# Altium PCB 滚动足球蓝牙款 V1.0 双面板 板厚1.0mm.PcbDoc (part 2 of 2)
Units mm, origin at the board's own origin, x right, y up, seen from the top; angles counter-clockwise.
Board outline 50.85 x 46.58 mm, 2 copper layers (Top Layer, Bottom Layer); 60 components, 35 nets, 162 pads, 92 vias.
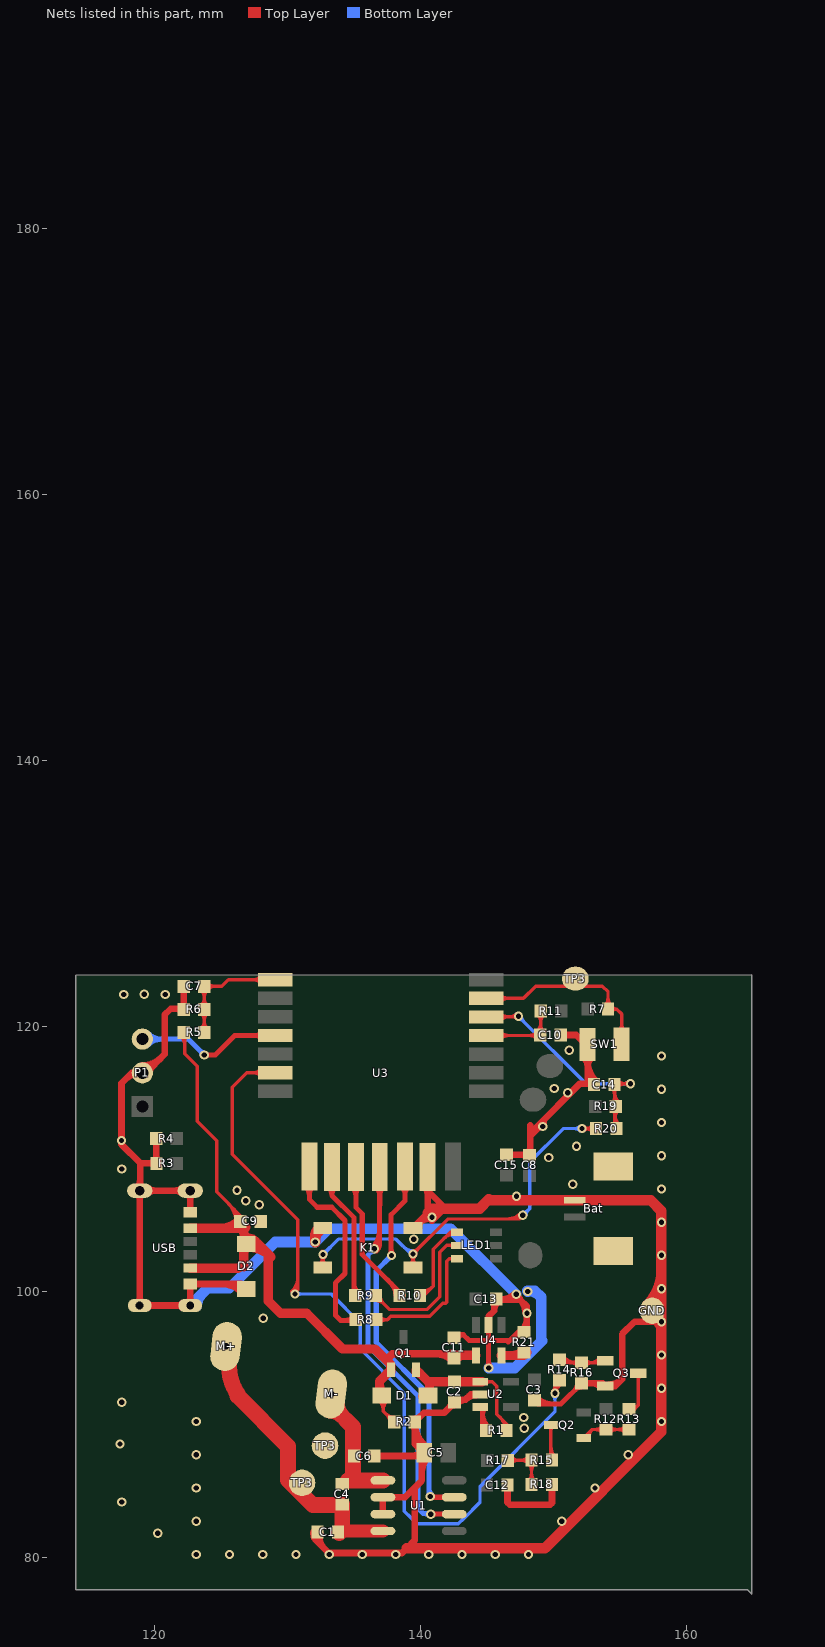
[diagram p2: the nets of this part, all layers, seen from the top]

## Via types
v1: diameter 0.7, hole 0.4, Top Layer to Bottom Layer, tented both sides, 92 vias

## Nets (pads, with @x,y where several pads share a name; then routed paths per layer and width w, separated by ;. In a path a pad name is that pad's centre, name@x,y a point inside that pad or via, vN(x,y) a via of type N, cw(c..) or ccw(c..) an arc to the next point about the centre after c; other vN are vias at no path point) (continued)
GND: Bat.2 Bat.3 Bat.4 C1.2 C2.1 C3.1 C5.2 C6.1 C7.1 C8.1 C9.1 C10.1 C11.1 C12.1 C13.1 C14.1 C15.1 D2.1 GND.1 K1.1 K1.2 P1.2 Q3.2 R2.1 R3.2 R4.2 R6.2 R16.1 R18.2 R21.1 SW1.1 U1.6 U1.7 U2.2 U3.13 U4.2 USB.7 USB.A12 USB.B12 | length 312.4
  Top Layer w0.381: C11.1@142.494,96.782 143.248,96.782 ; C11.1@142.816,96.476 cw(c143.248,96.325) 143.248,96.782 ; v1@145.048,94.398 ccw(c144.796,94.65) 145.153,94.65 ; 145.153,94.69 ccw(c145.566,94.69) v1@145.274,94.398 ; U4.2@145.153,97.515 145.153,96.342 ; v1(145.161,94.285) 145.153,94.293 145.153,96.342 ; 146.628,96.235 cw(c147.778,95.085) R21.1@147.778,96.711 ; 147.279,96.885 cw(c147.778,96.386) R21.1@147.778,97.092 ; R21.1@148.031,96.985 147.379,96.985 146.736,96.342 145.153,96.342 ; C3.1@148.54,91.788 ccw(c149.03,92.279) C3.1@149.03,91.585 ; C3.1@148.59,91.864 148.868,91.585 150.597,91.585 R16.1@152.146,93.134 ; C3.1@148.809,92.058 ccw(c149.95,93.199) 149.95,91.585 ; 151.635,92.623 ccw(c151.123,93.134) R16.1@151.847,93.134 ; R16.1@151.695,92.683 cw(c152.121,92.257) R16.1@152.121,92.859 ; 143.248,96.782 143.688,96.342 145.153,96.342
  Top Layer w0.5: 117.844,116.015 cw(c118.891,114.967) P1.2@119.094,116.435 ; P1.2@118.593,116.484 P1.2@119.101,116.484 ; USB.7@118.69,107.41 cw(c118.178,106.898) 118.902,106.898 cw(c119.626,106.898) USB.7@119.114,107.41 ; USB.7@118.69,107.834 ccw(c118.098,108.427) 118.935,108.427 ; USB.7@118.726,99.158 ccw(c118.3,99.584) 118.902,99.584 ; 118.902,99.586 ccw(c119.507,99.586) USB.7@119.079,99.158 ; 118.935,108.266 ccw(c119.546,108.266) USB.7@119.114,107.834 ; P1.2@119.101,117.034 ccw(c119.101,119.037) 120.516,117.621 ; USB.7@119.479,98.805 cw(c119.906,98.378) 119.906,98.982 cw(c119.906,99.585) USB.7@119.479,99.158 ; USB.7@119.514,107.41 cw(c120.026,106.898) 120.026,107.622 cw(c120.026,108.346) USB.7@119.514,107.834 ; 119.611,109.69 ccw(c119.611,110.251) 120.007,109.854 ccw(c119.671,110.191) 120.147,110.191 ; P1.2@119.651,116.484 cw(c120.304,116.484) 119.842,116.946 ; 119.67,109.69 cw(c119.67,109.213) R3.2@120.007,109.55 ; R4.2@119.995,111.354 cw(c119.628,110.987) 120.147,110.987 cw(c120.666,110.987) R4.2@120.299,111.354 ; 120.147,110.252 ccw(c120.709,110.252) R3.2@120.311,109.854 ; R4.2@120.147,111.531 R3.2@120.147,109.69 ; R3.2@120.159,109.677 R3.2@120.147,109.69 ; 121.635,121.31 cw(c121.635,120.703) R6.2@122.065,121.133 ; R6.2@122.065,121.437 ccw(c121.698,121.804) 122.217,121.804 ccw(c122.736,121.804) R6.2@122.369,121.437 ; C7.1@122.065,122.81 cw(c121.698,122.443) 122.217,122.443 cw(c122.736,122.443) C7.1@122.369,122.81 ; USB.7@122.09,107.41 ccw(c121.578,106.898) 121.578,107.622 ccw(c121.578,108.346) USB.7@122.09,107.834 ; USB.7@122.126,98.805 ccw(c121.699,98.378) 121.699,98.982 ccw(c121.699,99.585) USB.7@122.126,99.158 ; C7.1@122.217,122.987 R6.2@122.217,121.26 122.166,121.31 121.234,121.31 120.777,120.853 120.777,117.881 119.38,116.484 P1.2@119.101,116.484 ; USB.7@122.49,107.41 cw(c121.978,106.898) 122.702,106.898 cw(c123.427,106.898) USB.7@122.914,107.41 ; USB.7@122.526,99.158 ccw(c122.1,99.584) 122.702,99.584 ; 122.702,99.586 ccw(c123.307,99.586) USB.7@122.879,99.158 ; USB.B12@122.702,106.002 USB.7@122.702,107.622 USB.7@118.902,107.622 ; 125.045,100.602 cw(c125.045,98.45) D2.1@126.567,99.971 ; D2.1@126.253,100.602 cw(c126.253,99.657) D2.1@126.92,100.325 ; D2.1@126.914,100.219 126.532,100.602 USB.A12@122.702,100.602 USB.7@122.703,98.982 USB.7@118.902,98.982 USB.7@118.902,107.622 ; C1.2@132.002,81.997 ccw(c132.664,81.8) 132.176,81.311 ; C1.2@132.275,81.94 132.275,81.212 133.121,80.366 138.633,80.366 138.988,80.721 139.598,81.331 139.598,85.293 ; C1.2@132.481,81.854 ccw(c133.58,81.528) 132.77,80.717 ; C6.1@136.558,87.655 139.75,87.655 C5.2@140.131,88.036 ; C6.1@136.71,87.503 cw(c137.077,87.136) 137.077,87.655 cw(c137.077,88.174) C6.1@136.71,87.807 ; U1.7@137.195,83.287 U1.6@137.195,84.557 138.862,84.557 139.598,85.293 ; 139.316,87.655 ccw(c139.316,88.747) C5.2@140.088,87.975 ; R2.1@139.429,90.044 cw(c139.062,89.677) 139.581,89.677 cw(c140.1,89.677) R2.1@139.733,90.044 ; K1.2@139.461,104.826 140.557,105.923 U3.13@140.557,109.413 ; 139.581,89.207 ccw(c141.207,89.207) C5.2@140.218,87.917 ; R2.1@139.581,90.461 ccw(c139.581,91.04) R2.1@139.991,90.631 ; K1.2@139.642,105.007 cw(c140.894,103.756) v1@140.894,105.526 ; 139.684,88.483 ccw(c140.043,88.843) C5.2@140.212,88.363 ; 139.733,87.655 cw(c139.733,87.153) C5.2@140.088,87.508 ; R2.1@139.796,90.246 cw(c140.255,90.246) R2.1@139.93,90.57 ; K1.2@139.911,104.826 cw(c140.997,104.826) 140.229,105.594 ; 140.131,86.485 cw(c141.578,86.485) C5.2@140.555,87.508 ; U3.13@140.31,107.966 cw(c139.712,107.368) 140.557,107.368 cw(c141.402,107.368) U3.13@140.805,107.966 ; C5.2@140.522,88.314 cw(c141.984,90.221) R2.1@139.581,90.221 ; 140.557,106.679 ccw(c141.947,106.679) v1@140.965,105.697 ; 140.64,107.544 141.656,106.528 ; v1@140.894,105.359 141.91,106.375 ; C2.1@142.186,91.302 ccw(c141.776,91.711) C2.1@142.356,91.711 ; C2.1@142.246,91.362 cw(c142.571,91.038) C2.1@142.571,91.496 ; C2.1@142.794,91.585 cw(c143.408,91.138) 143.408,91.897 ; 143.427,91.916 cw(c144.222,91.122) U2.2@144.222,92.245 ; 143.599,92.088 cw(c144.04,91.647) U2.2@144.208,92.247 ; U2.2@144.53,92.304 U2.2@144.522,92.295 ; U2.2@144.674,92.295 U2.2@144.522,92.295 ; U4.2@145.153,97.515 145.153,98.178 145.567,98.593 145.567,99.204 145.779,99.416 147.523,99.416 148.031,98.908 R21.1@148.031,96.985 ; 145.567,98.58 cw(c146.527,98.58) C13.1@145.864,99.273 ; C13.1@145.867,99.277 cw(c146.203,98.941) 146.203,99.416 ; C13.1@145.867,99.581 ccw(c146.266,99.979) 146.266,99.416 ; C13.1@145.996,99.416 ccw(c145.996,101.045) v1@147.148,99.893 ; C12.1@146.414,85.294 cw(c146.047,84.927) 146.566,84.927 cw(c147.085,84.927) C12.1@146.718,85.294 ; C15.1@146.482,110.32 148.26,110.32 148.285,110.295 148.285,112.243 ; C12.1@146.566,85.471 146.566,84.168 146.736,83.998 149.784,83.998 149.919,84.133 R18.2@149.919,85.522 ; C15.1@146.659,110.168 cw(c147.026,109.801) 147.026,110.32 cw(c147.026,110.839) C15.1@146.659,110.472 ; 147.203,99.416 ccw(c147.203,99.837) 147.501,99.539 ; 147.501,99.438 cw(c146.463,98.4) v1@147.931,98.4 ; 147.629,110.32 cw(c147.629,109.714) C8.1@148.057,110.143 ; R21.1@147.676,97.137 ccw(c146.817,97.996) 148.031,97.996 ; C8.1@148.107,110.447 ccw(c147.678,110.876) 148.285,110.876 ; 148.285,111.709 v1@149.301,112.725 ; 148.285,112.547 148.285,112.243 ; C3.1@148.404,92.05 C3.1@148.59,91.864 ; R18.2@149.767,85.345 cw(c149.4,84.978) 149.919,84.978 cw(c150.438,84.978) R18.2@150.071,85.345 ; C10.1@150.571,119.329 151.742,119.329 152.599,118.472 152.599,116.15 153.078,115.672 152.019,115.672 148.59,112.243 148.285,112.243 ; C10.1@150.723,119.177 cw(c151.09,118.81) 151.09,119.329 cw(c151.09,119.848) C10.1@150.723,119.481 ; R16.1@152.146,93.134 153.713,93.134 Q3.2@153.919,92.928 154.676,92.928 155.194,93.447 155.194,96.825 156.134,97.765 157.734,97.765 158.14,97.358 ; R16.1@152.323,92.982 cw(c152.69,92.615) 152.69,93.134 cw(c152.69,93.653) R16.1@152.323,93.286 ; SW1.1@152.352,117.575 cw(c151.754,116.977) 152.599,116.977 cw(c153.444,116.977) SW1.1@152.847,117.575 ; 152.599,116.163 ccw(c153.545,116.163) C14.1@152.876,115.495 ; 152.599,117.371 ccw(c154.752,117.371) C14.1@153.23,115.849 ; C14.1@152.668,116.081 ccw(c153.078,116.491) C14.1@153.078,115.912 ; C14.1@152.728,116.021 cw(c152.404,115.697) C14.1@152.863,115.697 ; 152.906,93.134 cw(c152.906,92.191) Q3.2@153.573,92.858 ; C14.1@152.926,115.52 ccw(c152.559,115.153) 152.559,115.672 ccw(c152.559,116.191) C14.1@152.926,115.824 ; Q3.2@154.194,93.028 ccw(c154.194,94.434) 155.187,93.44 ; v1@157.917,97.581 cw(c158.144,97.807) GND.1@157.916,98.033 ; USB.7@118.902,107.622 118.935,107.655 118.935,109.69 ; 118.935,109.69 R3.2@120.147,109.69 ; 118.935,109.69 117.526,111.1 117.526,115.697 118.313,116.484 P1.2@119.101,116.484 ; 132.275,81.396 ccw(c131.756,81.396) 132.123,81.763 cw(c131.756,81.396) 132.275,81.396 ; 132.275,81.396 cw(c132.794,81.396) 132.427,81.763 ccw(c132.794,81.396) 132.275,81.396 ; R2.1@139.581,90.221 139.581,88.586 C5.2@140.131,88.036 ; R2.1@139.581,90.221 140.267,90.907 141.791,90.907 C2.1@142.596,91.711 142.781,91.897 143.408,91.897 ; 139.598,85.293 140.131,85.826 C5.2@140.131,88.036 ; 143.408,91.897 143.806,92.295 U2.2@144.522,92.295 ; v1@147.318,99.822 ccw(c147.805,99.822) 147.461,99.478 cw(c147.805,99.822) v1@147.318,99.822
  Top Layer w0.8: v1(132.118,103.759) 132.118,104.284 K1.1@132.661,104.826 ; v1@132.118,103.999 cw(c133.237,103.999) K1.1@132.446,104.791 ; 132.118,104.21 cw(c132.794,104.21) K1.1@132.437,104.784 ; 138.988,80.721 149.385,80.721 158.14,89.476 158.14,97.358 158.14,106.096 157.346,106.89 Bat.2@151.625,106.89 145.168,106.89 ; 140.557,105.923 140.781,106.147 ; 140.781,106.223 140.826,106.267 144.469,106.267 145.168,106.966 ; GND.1@157.101,99.044 ccw(c154.592,101.553) 158.14,101.553 ; GND.1@157.4,97.993 cw(c157.309,97.167) 158.14,97.167 ; GND.1@157.667,98.478 ccw(c156.523,99.621) 158.14,99.621
  Bottom Layer w0.8: USB.7@122.703,98.982 124,100.279 125.628,100.279 129.108,103.759 v1(132.118,103.759) 133.122,104.763 142.277,104.763 v1(147.218,99.822) ; USB.7@123.203,98.982 cw(c124.41,98.982) 123.556,99.835 ; v1(145.161,94.285) 147.117,94.285 149.161,96.329 149.098,96.393 149.098,99.619 148.615,100.101 148.082,100.101 v1(148.082,100.038) ; v1@148.075,100.087 cw(c148.206,99.095) 148.914,99.803 ; v1@148.082,100.088 cw(c148.082,98.768) 149.016,99.701
  other v1: 123.152,80.251 125.652,80.251 128.152,80.251 130.652,80.251 133.152,80.251 135.652,80.251 138.152,80.251 140.652,80.251 143.152,80.251 145.652,80.251 148.152,80.251 120.269,81.852 123.152,82.751 150.652,82.751 117.538,84.201 123.152,85.251 153.152,85.251 123.152,87.751 155.652,87.751 117.424,88.557 147.828,89.738 123.152,90.251 158.152,90.251 147.803,90.551 117.538,91.707 158.152,92.751 158.152,95.251 158.152,97.751 128.194,98.019 148.031,98.4 158.152,100.251 158.152,102.751 139.522,103.962 158.152,105.251 140.894,105.626 127.902,106.553 126.886,106.87 147.244,107.201 126.225,107.658 158.152,107.751 151.486,108.102 117.538,109.245 149.682,110.109 158.152,110.251 151.765,110.973 117.526,111.392 149.212,112.446 158.152,112.751 151.105,114.998 158.152,115.251 150.089,115.303 158.152,117.751 151.206,118.186 117.704,122.377 120.815,122.377 119.253,122.403
KEY_USER: C14.2 R19.1 R20.2 U3.19 | length 29.4
  Top Layer w0.254: U3.19@144.957,120.693 147.109,120.693 v1@147.282,120.866 ; U3.19@146.021,120.429 cw(c146.658,119.793) 146.658,120.693 cw(c146.658,121.594) U3.19@146.021,120.957 ; 146.717,120.693 ccw(c146.717,121.431) v1@147.239,120.909 ; 146.999,120.693 cw(c146.999,120.354) v1@147.239,120.594 ; C14.2@154.379,115.408 cw(c153.802,114.831) 154.618,114.831 cw(c155.434,114.831) C14.2@154.857,115.408 ; R19.1@154.48,113.731 cw(c154.149,113.399) 154.618,113.399 ; R19.1@154.48,114.259 ccw(c154.149,114.591) 154.618,114.591 ; R20.2@154.531,112.557 ccw(c154.322,112.766) R20.2@154.618,112.766 ; 154.618,112.889 ccw(c155.341,112.889) R20.2@154.83,112.378 ; 154.618,112.909 cw(c155.781,112.909) R19.1@154.958,113.731 ; R19.1@154.618,113.502 ccw(c155.954,113.502) R20.2@155.009,112.557 ; 154.618,115.081 ccw(c155.781,115.081) R19.1@154.958,114.259 ; R20.2@154.77,112.293 154.618,112.446 154.618,115.672 v1(155.829,115.672) ; C14.2@154.857,115.433 cw(c155.434,114.856) 155.434,115.672 cw(c155.434,116.488) C14.2@154.857,115.911 ; v1@155.671,115.514 ccw(c155.291,115.133) 155.291,115.672 ccw(c155.291,116.21) v1@155.671,115.829
  Bottom Layer w0.254: v1@147.396,120.529 cw(c147.396,119.99) 147.777,120.371 cw(c148.158,120.752) v1@147.619,120.752 ; v1(147.396,120.752) 152.476,115.672 153.264,115.672 v1(155.829,115.672) ; v1@155.671,115.514 ccw(c155.291,115.133) 155.291,115.672 ccw(c155.291,116.21) v1@155.671,115.829
LED_B: R10.2 U3.10 | length 13.7
  Top Layer w0.381: U3.10@134.868,107.924 cw(c134.169,107.225) 135.157,107.225 cw(c136.146,107.225) U3.10@135.447,107.924 ; U3.10@135.157,109.413 135.157,106.364 135.641,105.88 135.641,102.806 137.56,100.887 R10.2@138.727,99.72 ; 137.799,100.648 cw(c136.896,99.745) R10.2@138.173,99.745
LED_G: R9.2 U3.9 | length 12.7
  Top Layer w0.381: U3.9@133.077,107.915 cw(c132.466,107.266) 133.357,107.266 ; U3.9@133.357,109.413 133.357,107.266 ; U3.9@133.638,107.915 ccw(c134.248,107.266) 133.357,107.266 ; 135.006,100.682 ccw(c136.057,100.682) R9.2@135.314,99.94 ; R9.2@135.12,99.72 135.006,99.834 135.006,105.617 133.357,107.266
LED_R: R8.2 U3.8 | length 17.5
  Top Layer w0.381: U3.8@131.369,107.957 cw(c130.67,107.258) 131.659,107.258 cw(c132.648,107.258) U3.8@131.949,107.957 ; U3.8@131.659,109.447 131.659,106.974 132.258,106.375 133.35,106.375 134.341,105.385 134.341,101.397 133.629,100.686 133.629,98.247 134.01,97.866 135.095,97.866 R8.2@135.145,97.917 ; 134.42,97.866 ccw(c134.42,98.617) R8.2@134.951,98.086 ; 134.545,97.866 cw(c134.545,97.292) R8.2@134.951,97.698
M_INA: U1.2 U3.11 | length 36
  Top Layer w0.381: v1@136.438,103.364 ccw(c135.246,104.556) 136.931,104.556 ; v1@136.55,103.41 ccw(c136.55,103.918) 136.909,103.559 ; v1@136.601,103.251 136.931,103.581 136.931,106.502 136.957,106.528 U3.11@136.957,109.413 ; U3.11@136.668,107.924 cw(c135.969,107.225) 136.957,107.225 cw(c137.946,107.225) U3.11@137.247,107.924 ; v1@136.707,103.094 ccw(c136.165,103.636) 136.931,103.636 ; v1(140.792,83.287) U1.2@142.56,83.287 ; v1@140.905,83.174 cw(c141.177,82.902) 141.177,83.287 cw(c141.177,83.672) v1@140.905,83.399
  Bottom Layer w0.381: v1@136.391,103.251 cw(c136.006,103.251) 136.278,102.979 cw(c136.55,102.706) v1@136.55,103.092 ; v1(136.55,103.251) 136.061,102.761 136.061,95.953 139.827,92.187 139.827,83.744 140.233,83.337 140.741,83.337 v1(140.792,83.287) ; 140.284,83.337 cw(c140.284,82.779) v1@140.679,83.174
M_INB: U1.3 U3.12 | length 32.6
  Top Layer w0.381: v1@137.795,102.845 137.82,102.87 137.82,105.816 138.859,106.855 U3.12@138.859,109.447 ; 137.82,103.189 ccw(c138.292,103.189) v1@137.959,102.856 ; U3.12@138.569,107.957 cw(c137.87,107.258) 138.859,107.258 cw(c139.848,107.258) U3.12@139.149,107.957 ; v1(140.767,84.607) 140.818,84.557 U1.3@142.56,84.557 ; v1@140.88,84.72 ccw(c141.275,85.115) 141.275,84.557
  Bottom Layer w0.381: v1@137.686,102.743 cw(c137.301,102.743) 137.574,102.471 cw(c137.846,102.198) v1@137.846,102.584 ; v1(137.846,102.743) 136.696,101.593 136.696,97.307 136.696,96.216 140.658,92.254 v1@140.658,84.716 ; 140.658,85.255 ccw(c141.414,85.255) v1@140.88,84.72
NetC1_1: C1.1 C4.2 M+.1 TP3.1@131.115,85.636 U1.8 | length 22.1
  Top Layer w1: C1.1@133.815,81.94 133.891,82.017 U1.8@137.195,82.017
  Top Layer w1.2: M+.1@125.833,95.613 ccw(c129.294,94.394) 126.314,92.253 ; 126.263,92.177 130.048,88.392 130.048,85.852 131.928,83.972 134.095,83.972 C4.2@134.137,84.015 C1.1@134.137,82.263 ; C1.1@133.911,81.87 ccw(c133.363,82.417) C1.1@134.137,82.417
NetC2_2: C2.2 D1.2 Q1.2 R1.1 U2.1 | length 15.7
  Top Layer w0.254: U2.1@144.522,93.245 145.439,93.245 145.771,92.913 145.771,90.805 146.49,90.086 ; U2.1@144.944,93.123 cw(c145.239,92.828) 145.239,93.245 cw(c145.239,93.663) U2.1@144.944,93.368 ; 146.01,90.565 cw(c145.056,89.611) R1.1@146.406,89.611 ; R1.1@146.379,89.93 ccw(c146.325,90.086) 146.49,90.086 ; 146.444,90.132 cw(c145.923,89.611) R1.1@146.66,89.611 ; R1.1@146.49,89.586 146.49,90.086 ; R1.1@146.601,89.93 cw(c146.655,90.086) 146.49,90.086
  Top Layer w0.5: D1.2@140.343,92.524 140.549,92.317 D1.2@140.702,92.165
  Top Layer w0.7: Q1.2@139.697,93.965 cw(c139.697,93.518) 140.013,93.834 ; Q1.2@139.697,94.15 140.602,93.245 ; D1.2@140.194,92.165 D1.2@140.196,92.165 ; D1.2@140.511,92.38 ccw(c140.049,92.841) 140.702,92.841 ; D1.2@140.549,92.165 D1.2@140.549,92.317 ; D1.2@140.702,92.165 140.702,93.145 140.602,93.245 ; U2.1@144.674,93.245 U2.1@144.522,93.245 140.602,93.245
NetC4_1: C4.1 C6.2 M-.1 TP3.1@132.842,88.443 U1.5 | length 10.7
  Top Layer w0.7: C4.1@134.162,85.67 ccw(c134.162,86.275) C4.1@134.59,85.847 ; C4.1@134.417,85.674 134.569,85.827 134.958,86.216 ; U1.5@136.66,85.827 U1.5@137.195,85.827
  Top Layer w1.2: M-.1@133.231,91.08 cw(c133.231,89.924) 134.048,90.742 ; M-.1@133.731,91.58 ccw(c134.988,91.58) 134.099,90.691 ; 134.417,90.373 134.958,89.832 134.958,87.528 134.958,86.216 ; C4.1@134.569,85.827 U1.5@137.195,85.827
NetK1_3: K1.3 K1.4 R20.1 | length 41.8
  Top Layer w0.254: K1.3@132.432,102.055 ccw(c131.881,102.606) 132.661,102.606 ccw(c133.44,102.606) K1.3@132.889,102.055 ; v1@132.532,102.662 cw(c132.221,102.351) 132.661,102.351 ; v1@132.613,103.086 132.661,103.039 K1.3@132.661,101.826 ; K1.3@132.661,102.211 cw(c133.298,102.211) v1@132.847,102.662 ; K1.4@139.232,102.055 ccw(c138.681,102.606) 139.461,102.606 ccw(c140.24,102.606) K1.4@139.689,102.055 ; v1@139.303,102.702 cw(c138.922,102.321) 139.461,102.321 cw(c139.999,102.321) v1@139.618,102.702 ; K1.4@139.461,101.826 v1(139.461,102.859) 142.088,105.486 147.447,105.486 v1(147.726,105.766) ; v1@139.461,103.082 ccw(c139.461,103.621) 139.841,103.24 ccw(c140.222,102.859) v1@139.684,102.859 ; 146.514,105.486 ccw(c146.514,106.978) v1@147.569,105.923 ; 147.127,105.486 ccw(c147.127,106.365) v1@147.748,105.744 ; v1(152.171,112.293) R20.1@153.23,112.293 ; v1@152.329,112.136 cw(c152.71,111.755) 152.71,112.293 cw(c152.71,112.832) v1@152.329,112.451 ; R20.1@152.991,112.054 ccw(c152.414,111.477) 152.414,112.293 ccw(c152.414,113.109) R20.1@152.991,112.532
  Bottom Layer w0.254: v1(132.69,102.819) 133.852,103.982 138.182,103.982 v1@139.304,102.859 ; v1@132.69,103.042 ccw(c132.69,103.581) 133.07,103.2 ccw(c133.451,102.819) v1@132.913,102.819 ; 138.813,103.351 ccw(c139.461,103.998) v1@139.461,103.082 ; v1(147.726,105.766) 148.234,106.274 148.234,109.779 150.749,112.293 v1(152.171,112.293) ; v1@147.726,105.989 ccw(c147.726,106.527) 148.107,106.146 ccw(c148.488,105.766) v1@147.949,105.766 ; v1@152.014,112.136 ccw(c151.633,111.755) 151.633,112.293 ccw(c151.633,112.832) v1@152.014,112.451
NetLED1_1: LED1.1 R10.1 | length 10
  Top Layer w0.254: R10.1@139.995,99.829 ccw(c140.066,100.565) 140.589,100.042 ; R10.1@140.019,100.082 ccw(c140.132,101.261) 140.97,100.424 ; R10.1@140.267,99.72 140.97,100.424 ; 141.781,104.018 cw(c142.588,103.211) LED1.1@142.588,104.353 ; 142.101,104.338 cw(c142.327,104.112) LED1.1@142.506,104.378 ; 142.215,104.452 cw(c142.588,104.079) LED1.1@142.588,104.607 ; LED1.1@142.476,104.404 ccw(c142.263,104.218) 142.263,104.501 ; LED1.1@142.476,104.598 cw(c142.263,104.783) 142.263,104.501 ; LED1.1@142.763,104.501 142.263,104.501 ; 140.97,100.424 140.97,103.207 142.263,104.501
NetLED1_2: LED1.2 R9.1 | length 12.3
  Top Layer w0.254: R9.1@136.66,99.357 cw(c136.66,98.481) 137.28,99.101 ; R9.1@136.66,99.72 137.701,98.679 140.507,98.679 141.478,99.65 141.478,102.997 141.986,103.505 141.99,103.501 LED1.2@142.763,103.501 ; R9.1@136.998,99.695 ccw(c137.754,99.695) 137.219,99.161 ; LED1.2@142.483,103.396 ccw(c142.231,103.143) 142.231,103.501 ccw(c142.231,103.858) LED1.2@142.483,103.605
NetLED1_3: LED1.3 R8.1 | length 11.6
  Top Layer w0.254: R8.1@136.685,97.917 137.541,97.917 137.795,98.171 140.717,98.171 141.7,99.154 141.912,99.154 141.986,99.227 141.986,102.311 142.175,102.501 LED1.3@142.763,102.501 ; R8.1@136.924,97.678 cw(c137.501,97.101) 137.501,97.917 cw(c137.501,98.733) R8.1@136.924,98.156 ; LED1.3@142.483,102.396 ccw(c142.231,102.143) 142.231,102.501 ccw(c142.231,102.858) LED1.3@142.483,102.605
NetQ2_1: Q2.1 R12.2 R13.1 | length 8.2
  Top Layer w0.254: Q2.1@152.306,89.029 152.931,89.654 ; Q2.1@152.713,89.046 cw(c153.466,89.119) 152.931,89.654 ; R12.2@153.711,89.415 ccw(c153.134,88.838) 153.134,89.654 ccw(c153.134,90.47) R12.2@153.711,89.893 ; R12.2@154.239,89.415 cw(c154.816,88.838) 154.816,89.654 cw(c154.816,90.47) R12.2@154.239,89.893 ; R13.1@155.438,89.415 ccw(c154.861,88.838) 154.861,89.654 ccw(c154.861,90.47) R13.1@155.438,89.893 ; R13.1@155.702,89.654 152.931,89.654
NetQ2_3: Q2.3 R15.1 | length 5
  Top Layer w0.254: R15.1@149.68,87.615 ccw(c149.302,87.992) 149.836,87.992 ; Q2.3@149.714,89.857 cw(c149.419,89.561) 149.836,89.561 cw(c150.254,89.561) Q2.3@149.959,89.857 ; 149.836,88.391 ccw(c150.934,88.391) R15.1@150.158,87.615 ; Q2.3@149.836,89.979 149.836,87.433 R15.1@149.919,87.351 R15.1@150.217,87.649
NetQ3_1: Q3.1 R14.1 R16.2 | length 8.9
  Top Layer w0.254: R14.1@150.47,94.674 153.764,94.674 Q3.1@153.919,94.828 ; R14.1@150.554,94.962 ccw(c151.249,95.657) 151.249,94.674 ; R14.1@150.734,95.141 ccw(c151.862,96.27) R16.2@151.862,94.674 ; R16.2@151.882,94.435 ccw(c151.305,93.858) 151.305,94.674 ccw(c151.305,95.49) R16.2@151.882,94.913 ; R16.2@152.41,94.435 cw(c152.987,93.858) 152.987,94.674 cw(c152.987,95.49) R16.2@152.41,94.913 ; 152.732,94.674 ccw(c152.732,95.74) Q3.1@153.486,94.986
NetQ3_3: Q3.3 R13.2 | length 7.4
  Top Layer w0.254: R13.2@155.78,91.259 ccw(c155.988,91.513) 156.22,91.281 ; R13.2@155.941,91.455 ccw(c156.167,91.73) 156.419,91.479 ; R13.2@155.981,91.042 156.419,91.479 ; 156.419,92.165 Q3.3@156.419,93.878 156.419,91.479 ; 156.419,93.34 ccw(c155.88,93.34) 156.261,93.721 cw(c155.88,93.34) 156.419,93.34 ; 156.419,93.34 cw(c156.957,93.34) 156.576,93.721 ccw(c156.957,93.34) 156.419,93.34
NetR1_2: R1.2 U2.3 | length 4.3
  Top Layer w0.381: R1.2@144.674,90.019 ccw(c145.358,90.019) R1.2@144.874,89.535 ; 144.674,90.725 cw(c145.442,90.725) U2.3@144.899,91.268 ; 144.674,90.939 ccw(c146.278,90.939) R1.2@145.144,89.805 ; U2.3@144.674,91.345 144.674,89.862 R1.2@144.95,89.586
NetR7_1: R7.1 SW1.2 TP3.1@151.676,123.571 U3.20 | length 20
  Top Layer w0.254: U3.20@144.957,122.093 147.773,122.093 148.692,123.012 153.708,123.012 154.135,122.585 R7.1@154.135,121.285 154.788,121.285 ; U3.20@146.021,121.829 cw(c146.658,121.193) 146.658,122.093 cw(c146.658,122.994) U3.20@146.021,122.357 ; R7.1@153.896,121.549 ccw(c153.319,122.126) 154.135,122.126 ccw(c154.951,122.126) R7.1@154.374,121.549 ; R7.1@154.411,121.09 cw(c154.788,120.824) 154.788,121.285 ; R7.1@154.411,121.48 ccw(c154.788,121.746) 154.788,121.285 ; SW1.2@154.826,119.46 ccw(c154.018,120.268) 155.16,120.268 ccw(c156.302,120.268) SW1.2@155.495,119.46 ; SW1.2@155.16,118.476 155.16,120.912 154.788,121.285
NetR15_2: R15.2 R17.2 R18.1 | length 8.8
  Top Layer w0.254: R17.2@146.591,87.325 146.617,87.351 R15.2@148.379,87.351 R18.1@148.379,85.522 ; R17.2@146.83,87.111 cw(c147.408,86.533) 147.408,87.351 ; R17.2@146.83,87.589 ccw(c147.406,88.165) 147.406,87.351 ; R15.2@148.14,87.087 cw(c147.563,86.51) 148.379,86.51 cw(c149.195,86.51) R15.2@148.618,87.087 ; R15.2@148.14,87.112 ccw(c147.563,86.535) 147.563,87.351 ccw(c147.563,88.167) R15.2@148.14,87.59 ; R18.1@148.14,85.786 ccw(c147.563,86.363) 148.379,86.363 ccw(c149.195,86.363) R18.1@148.618,85.786
NetR21_2: R21.2 U4.5 | length 2.9
  Top Layer w0.7: U4.5@146.103,95.215 147.801,95.215 R21.2@148.031,95.445 ; 146.944,95.215 ccw(c146.944,96.278) R21.2@147.696,95.526
RESET: C10.2 R11.2 U3.18 | length 11.2
  Top Layer w0.254: U3.18@144.957,119.293 148.995,119.293 149.065,119.363 R11.2@149.065,121.133 ; U3.18@146.021,119.029 cw(c146.658,118.393) 146.658,119.293 cw(c146.658,120.194) U3.18@146.021,119.557 ; 148.189,119.293 ccw(c148.189,120.147) C10.2@148.792,119.543 ; 148.242,119.293 cw(c148.242,118.515) C10.2@148.792,119.065 ; C10.2@148.792,119.593 ccw(c148.135,120.251) 149.065,120.251 ; R11.2@148.826,120.869 cw(c148.249,120.292) 149.065,120.292 cw(c149.881,120.292) R11.2@149.304,120.869 ; 149.065,120.09 ccw(c149.767,120.09) C10.2@149.27,119.593
SWS: P1.3 U3.4 | length 16.6
  Top Layer w0.381: v1(123.749,117.831) 124.587,117.831 124.917,118.161 ; v1@123.862,117.718 cw(c124.134,117.446) 124.134,117.831 cw(c124.134,118.216) v1@123.862,117.943 ; 124.739,117.983 124.917,118.161 ; U3.4@128.088,119.074 ccw(c127.559,118.546) 127.559,119.293 ccw(c127.559,120.04) U3.4@128.088,119.512 ; U3.4@129.107,119.293 126.05,119.293 124.917,118.161
  Bottom Layer w0.381: P1.3@118.593,119.024 122.555,119.024 v1(123.749,117.831) ; P1.3@119.532,118.593 cw(c120.572,117.553) 120.572,119.024 cw(c120.572,120.496) P1.3@119.532,119.455 ; v1@123.589,117.831 ccw(c123.204,117.831) 123.477,118.103 ccw(c123.749,118.375) v1@123.749,117.99
USB_DEC: C7.2 R5.2 R6.1 U3.1 | length 16.8
  Top Layer w0.254: R5.2@123.518,119.796 ccw(c122.941,120.373) 123.757,120.373 ccw(c124.573,120.373) R5.2@123.996,119.796 ; R6.1@123.518,120.996 cw(c122.941,120.419) 123.757,120.419 cw(c124.573,120.419) R6.1@123.996,120.996 ; R6.1@123.518,121.524 ccw(c122.941,122.101) 123.757,122.101 ccw(c124.573,122.101) R6.1@123.996,121.524 ; C7.2@123.518,122.723 cw(c122.941,122.146) 123.757,122.146 cw(c124.573,122.146) C7.2@123.996,122.723 ; R5.2@123.757,119.532 C7.2@123.757,122.987 125.07,122.987 125.578,123.495 U3.1@129.108,123.495 ; C7.2@123.996,122.748 cw(c124.573,122.171) 124.573,122.987 cw(c124.573,123.803) C7.2@123.996,123.226 ; U3.1@128.044,123.231 ccw(c127.408,122.594) 127.408,123.495 ccw(c127.408,124.395) U3.1@128.044,123.759
V_BAT_CON: R14.2 U3.6 | length 69.9
  Top Layer w0.254: U3.6@128.044,116.231 ccw(c127.408,115.594) 127.408,116.495 ccw(c127.408,117.395) U3.6@128.044,116.759 ; U3.6@129.108,116.495 126.96,116.495 125.857,115.392 125.857,110.37 130.785,105.443 130.785,100.152 v1@130.48,99.847 ; v1@130.322,100.005 ccw(c129.206,101.122) 130.785,101.122 ; v1@130.502,99.825 ccw(c129.819,100.508) 130.785,100.508 ; v1@149.982,92.537 ccw(c149.601,92.918) 150.139,92.918 ccw(c150.678,92.918) v1@150.297,92.537 ; v1@150.139,92.187 cw(c151.197,92.187) R14.2@150.627,93.078 ; v1@150.139,92.227 150.139,93.032 R14.2@150.47,93.362 R14.2@150.452,93.345 ; v1@150.139,92.651 cw(c150.9,92.651) R14.2@150.49,93.292
  Bottom Layer w0.254: v1@130.48,99.847 133.299,99.847 135.489,97.657 135.489,95.717 138.811,92.395 138.811,83.497 139.31,82.998 ; v1@130.637,99.69 cw(c131.018,99.309) 131.018,99.847 cw(c131.018,100.386) v1@130.637,100.005 ; 139.524,82.784 139.31,82.998 ; 143.102,82.784 143.311,82.993 ; v1@149.982,92.222 cw(c149.601,91.841) 150.139,91.841 cw(c150.678,91.841) v1@150.297,92.222 ; v1@150.03,92.185 cw(c149.925,91.999) 150.139,91.999 ; v1@150.249,92.185 ccw(c150.353,91.999) 150.139,91.999 ; 139.31,82.998 139.753,82.556 142.873,82.556 143.311,82.993 ; 143.311,82.993 144.501,84.183 144.501,85.344 150.139,90.983 150.139,91.999
  other v1: 150.139,92.38 130.581,99.847
VCC_USB: C9.2 C11.2 D1.1 D2.2 Q1.1 R2.2 R5.1 U4.4 USB.A9 USB.B9 | length 73.9
  Top Layer w0.254: R5.1@121.978,119.268 cw(c121.198,118.488) 122.301,118.488 ; R5.1@122.217,119.532 122.301,119.448 122.301,117.932 123.241,116.992 123.241,112.827 124.689,111.379 124.689,107.536 C9.2@126.738,105.486 ; 122.301,118.895 cw(c122.83,118.895) R5.1@122.456,119.268 ; 125.576,106.648 cw(c124.261,105.333) C9.2@126.121,105.333 ; 126.01,106.215 cw(c125.128,105.333) C9.2@126.375,105.333 ; D1.1@136.884,91.868 cw(c136.049,91.03) 137.232,91.03 ; 137.232,91.095 cw(c138.325,91.095) D1.1@137.552,91.868 ; D1.1@137.232,92.165 137.232,91.03 ; 137.421,90.84 ccw(c138.041,91.46) R2.2@138.041,90.584 ; 137.482,90.78 cw(c136.947,90.246) R2.2@137.703,90.246 ; R2.2@138.041,90.221 137.232,91.03
  Top Layer w0.6: 137.719,95.148 137.922,95.352 C11.2@142.384,95.352 ; 141.323,95.352 cw(c141.323,93.842) C11.2@142.39,94.909
  Top Layer w0.7: USB.A9@122.702,101.802 122.726,101.778 126.314,101.778 126.734,102.197 ; USB.B9@122.702,104.802 126.671,104.802 126.746,104.877 D2.2@126.746,103.47 ; 125.018,104.802 ccw(c125.018,106.724) C9.2@126.377,105.365 ; C9.2@126.377,105.202 cw(c125.487,104.312) 126.746,104.312 ; 126.708,104.802 ccw(c126.708,105.034) C9.2@126.872,104.87 ; 126.734,101.892 126.734,102.197 ; 126.734,102.821 cw(c127.613,102.821) D2.2@126.991,103.442 ; D2.2@126.734,103.47 126.734,102.197 ; 126.746,104.388 ccw(c127.583,104.388) D2.2@126.991,103.796 ; D2.2@126.914,103.619 127.801,103.619 128.561,102.859 128.561,99.325 129.486,98.4 131.47,98.4 134.163,95.707 136.605,95.707 137.797,94.515 Q1.1@137.797,94.15 136.938,93.291 D1.1@136.938,92.306 ; D2.2@127.014,103.369 cw(c127.014,100.867) 128.783,102.636 ; D2.2@127.014,104.069 cw(c127.014,103.257) D2.2@127.588,103.831 ; D2.2@127.127,103.396 cw(c127.543,102.575) 128.194,103.226 ; D2.2@127.191,103.442 cw(c127.618,103.015) 127.618,103.619 cw(c127.618,104.222) D2.2@127.191,103.796 ; 136.938,92.998 ccw(c137.813,92.998) D1.1@137.194,92.38 ; 137.481,93.834 cw(c137.797,93.518) Q1.1@137.797,93.965 ; C11.2@142.384,95.352 142.494,95.242 144.176,95.242 U4.4@144.203,95.215 ; C11.2@142.638,94.945 cw(c143.356,94.227) 143.356,95.242
pads on no net: U1.1 U2.4 U3.2 U3.3 U3.17 U3.21

## Polygon pours and split planes (outlines as drawn)
GND on Top Layer "Bottom Layer-No Net" (solid, remove dead copper, pour order 1000): 116.751,122.906 116.759,122.898 125.705,122.898 125.565,122.758 125.565,112.116 125.565,110.871 129.553,106.883 130.518,105.918 143.002,105.918 143.002,106.159 147.955,111.112 149.149,112.306 149.149,122.834 155.486,122.834 155.537,122.885 159.385,119.037 159.385,117.885 159.385,88.757 159.384,88.756 159.436,88.704 159.436,84.404 159.067,84.404 154.292,79.629 153.518,78.854 148.603,78.854 123.521,78.854 123.519,78.852 123.509,78.842 120.332,78.842 120.332,80.164 116.751,83.746 116.751,98.996 122.718,98.996 122.879,99.158 122.914,99.193 122.914,107.41 117.1,107.41 116.751,107.759
GND on Bottom Layer "Bottom Layer-No Net" (solid, remove dead copper, pour order 1001): 116.751,122.906 127.16,122.906 127.178,122.923 127.178,111.265 129.197,109.245 129.235,109.207 144.958,109.207 145.097,109.207 147.231,111.341 147.231,122.339 147.231,122.822 147.168,122.885 155.372,122.885 155.88,122.885 159.156,119.609 159.391,119.374 159.391,117.885 159.391,84.575 159.296,84.48 153.67,78.854 148.336,78.854 121.642,78.854 116.751,83.746

## Keep-outs
Keep-Out Layer:
  circle w0.025: c124.26,92.727 r0.7
  circle w0.025: c129.36,94.147 r2.6
  circle w0.025: c152.335,98.543 r1.65
  circle w0.025: c121.48,115.909 r0.75
  circle w0.025: c119.315,95.193 r1.05
  circle w0.025: c124.099,177.873 r0.75
  circle w0.025: c121.934,157.157 r1.05
  circle w0.025: c126.879,154.691 r1.5
  circle w0.025: c154.955,160.507 r1.65
  circle w0.025: c131.979,156.11 r2.6
  circle w0.025: c138.68,165.29 r1.2
  lines w0.025: 116.751,95.073 116.751,111.58 ; 119.37,157.036 ccw(c138.68,165.29) 127.863,147.29 149.497,147.29 ccw(c138.68,165.29) 145.083,185.29 132.277,185.29 ccw(c138.68,165.29) 119.37,173.543 ; 122.159,165.29 125.609,165.29 ; 123.519,78.852 cw(c136.061,103.326) 116.751,83.746 116.751,122.906 cw(c136.061,103.326) 159.391,117.885 ; 123.519,78.854 148.603,78.854 ; 138.68,165.29 138.68,166.49 ; 148.603,78.853 ccw(c136.061,103.326) 159.384,88.756 ; 159.385,88.756 159.385,117.885 ; 118.709,160.865 118.709,169.715 125.609,169.715 125.609,160.865 118.709,160.865 ; 119.37,145.71 ccw(c138.68,165.29) 119.37,184.87 119.37,145.71 ; 127.685,157.242 ccw(c127.933,157.212) 128.182,157.181 128.346,158.521 ccw(c128.098,158.552) 127.85,158.582 127.685,157.242 ; 135.606,153.65 ccw(c135.855,153.619) 136.103,153.589 136.267,154.929 ccw(c136.019,154.959) 135.771,154.99 135.606,153.65 ; 136.43,163.04 136.43,167.54 140.93,167.54 140.93,163.04 136.43,163.04

## Other copper
Top Layer:
  region net NetC4_1: 134.515,90.051 135.087,94.713 132.445,95.038 131.873,90.376
  region net NetC1_1: 126.301,93.651 126.873,98.312 124.317,98.626 123.745,93.964
  rectangle net GND: 139.954,105.524 141.16,107.696
  rectangle net BAT+: 141.402,85.534 142.684,90.386
  rectangle net 3V3: 148.488,92.951 149.085,94.475
  rectangle net NetC4_1: 133.388,87.732 134.62,89.154
  rectangle net GND: 140.557,106.389 144.591,107.061
  rectangle net GND: 152.4,108.788 157.074,110.084
  rectangle net GND: 154,107.671 154.889,111.277
  rectangle net GND: 152.146,102.845 157.048,103.708
  rectangle net GND: 154.102,100.99 155.296,102.794
Bottom Layer:
  region net NetC4_1: 134.512,90.052 135.084,94.714 132.448,95.037 131.876,90.376
  region net NetC1_1: 126.282,93.653 126.854,98.315 124.317,98.626 123.745,93.964

## Silkscreen, mask and mechanical layers (free items; w line width, h text height)
Top Overlay:
  circle w0.025: c119.414,95.263 r2.5
  circle w0.025: c152.346,98.58 r2.5
  lines w0.025: 131.321,173.581 131.321,193.145 167.756,193.145 167.756,173.581 131.321,173.581 ; 140.935,100.625 140.935,106.625 146.935,106.625 146.935,100.625 140.935,100.625
  text "-" at 150.863,107.734 h0.76 r90
  text "+" at 150.393,103.975 h0.76
  text "+" at 146.935,101.727 h0.76 r90
Top Solder:
  lines w0.5: 122.707,103.835 123.342,103.835 123.368,103.81 ; 122.885,102.819 123.52,102.819 ; 141.884,103.505 141.91,103.48 142.621,103.48 ; 141.91,102.489 142.443,102.489 ; 141.91,104.572 142.596,104.572 ; 145.466,103.48 146.355,103.48 ; 145.466,104.521 146.304,104.521 ; 145.542,102.514 146.431,102.514
  lines w0.6: 122.657,106.02 123.622,106.02 ; 122.758,104.826 122.834,104.826 122.86,104.8 123.622,104.8 ; 122.885,101.803 123.723,101.803 123.749,101.829 ; 122.911,100.609 123.698,100.609 123.723,100.584